# Altium PCB LPCB279R0.PcbDoc (part 3 of 3)
Units mm, origin at the board's own origin, x right, y up, seen from the top; angles counter-clockwise.
Board outline 96 x 109 mm, 2 copper layers (Top Layer, Bottom Layer); 115 components, 90 nets, 384 pads, 812 vias.
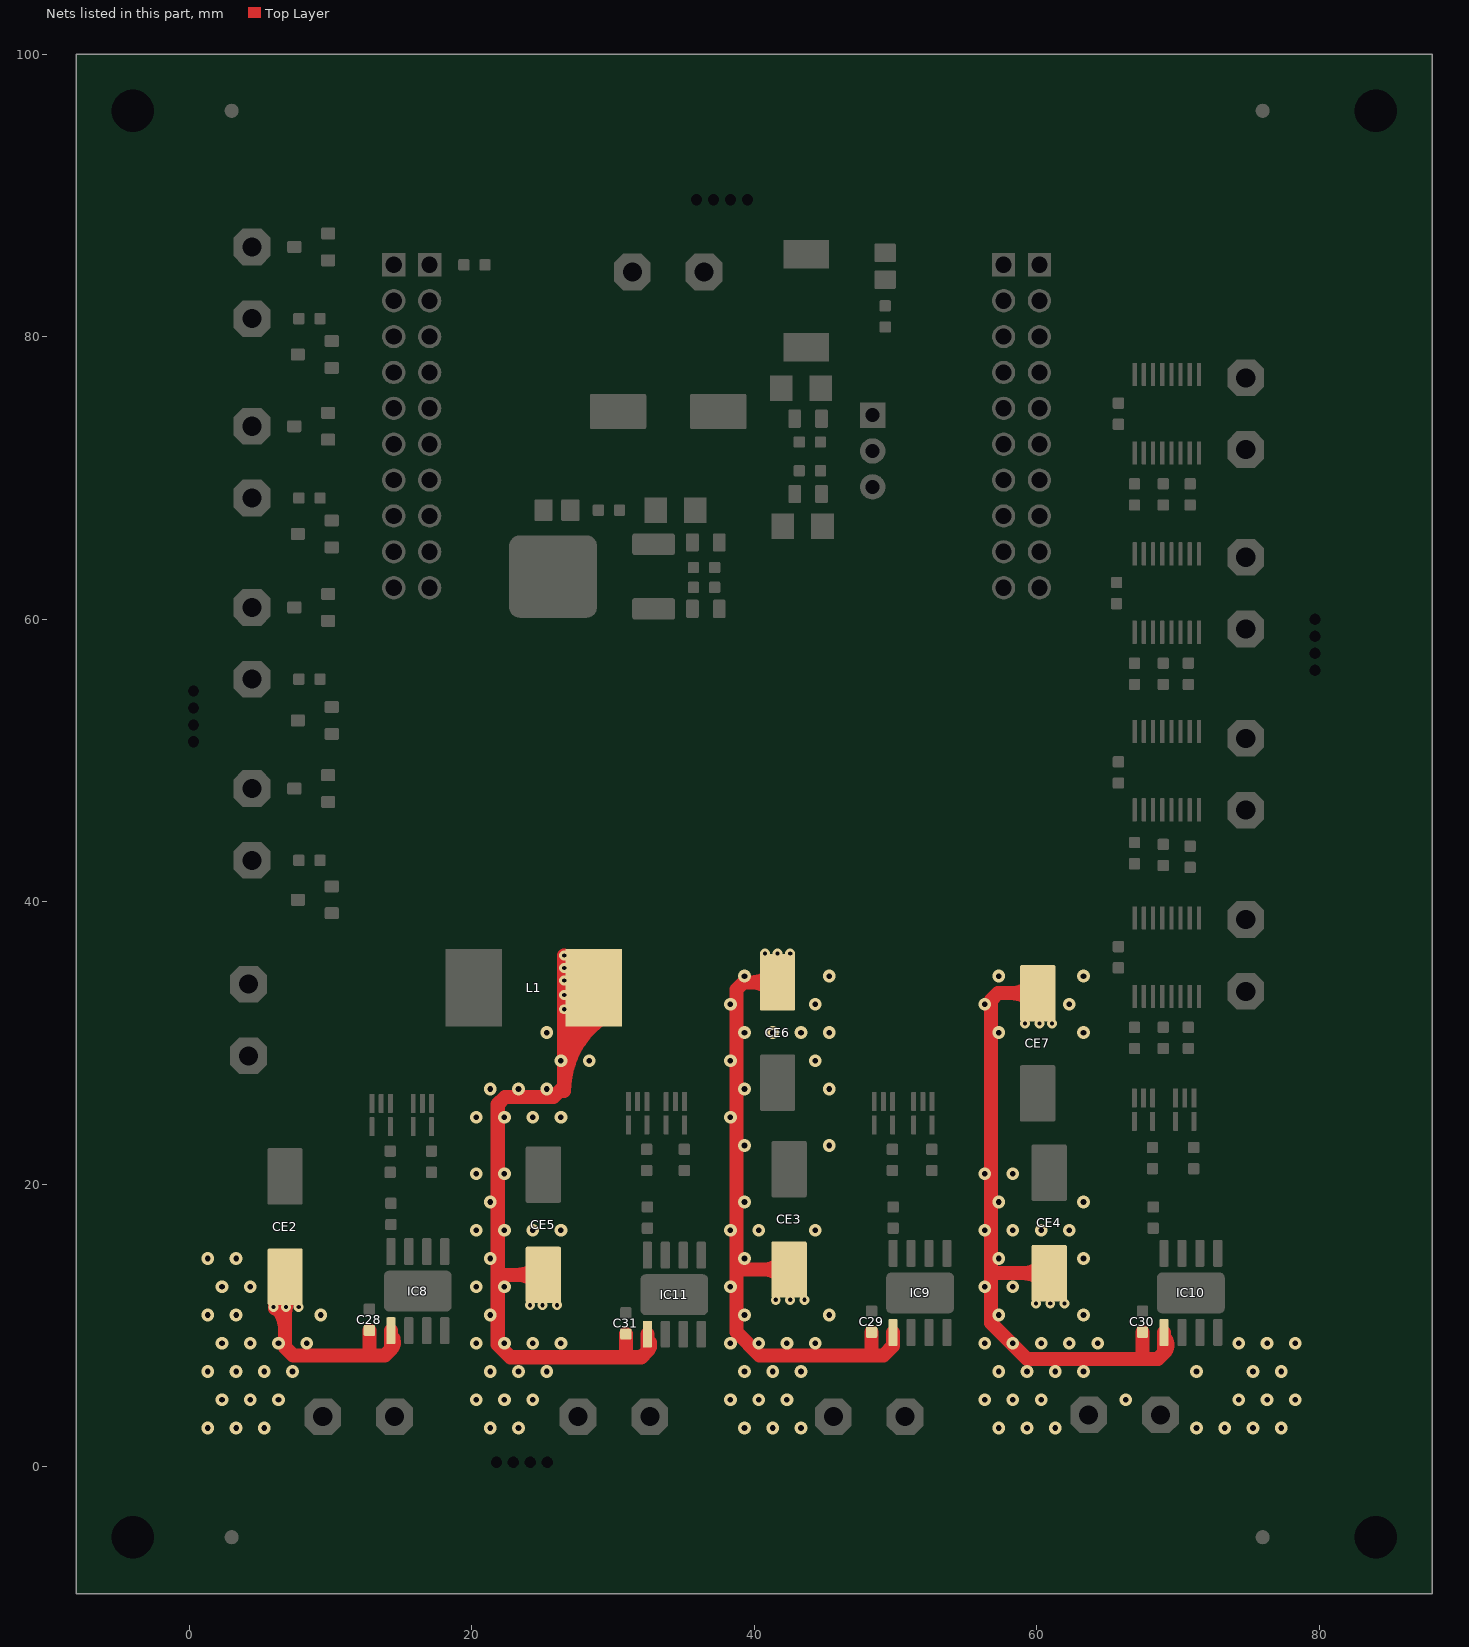
[diagram p3: the nets of this part, all layers, seen from the top]

## Via types
v1: diameter 0.9, hole 0.4, Top Layer to Bottom Layer, tented both sides, 631 vias
v2: diameter 0.7, hole 0.3, Top Layer to Bottom Layer, tented both sides, 111 vias
v3: diameter 0.6, hole 0.2, Top Layer to Bottom Layer, tented both sides, 33 vias
v4: diameter 0.7, hole 0.33, Top Layer to Bottom Layer, tented bottom, 24 vias
v5: diameter 0.8, hole 0.4, Top Layer to Bottom Layer, tented both sides, 13 vias

## Nets (pads, with @x,y where several pads share a name; then routed paths per layer and width w, separated by ;. In a path a pad name is that pad's centre, name@x,y a point inside that pad or via, vN(x,y) a via of type N, cw(c..) or ccw(c..) an arc to the next point about the centre after c; other vN are vias at no path point) (continued)
VMOTOR: C28.1 C29.1 C30.1 C31.1 CE2.1 CE3.1 CE4.1 CE5.1 CE6.1 CE7.1 IC8.5 IC9.5 IC10.5 IC11.5 L1.2 | length 203.4
  Top Layer w1: v2@6.075,11.197 ccw(c4.364,12.908) CE2.1@6.784,12.908 ; v2@6.075,11.409 cw(c4.364,9.698) 6.784,9.698 ; CE2.1@6.254,12.169 cw(c4.973,10.888) 6.784,10.888 cw(c8.595,10.888) CE2.1@7.314,12.169 ; CE2.1@6.784,13.449 6.784,8.456 7.366,7.874 12.827,7.874 ; C28.1@12.753,9.645 12.753,7.948 12.827,7.874 ; 14.085,8.116 ccw(c13.199,9.002) IC8.5@14.452,9.002 ; IC8.5@14.277,9.627 14.277,8.308 ; IC8.5@14.441,9.063 cw(c13.772,8.813) 14.277,8.308 ; CE5.1@24.542,13.046 ccw(c23.261,11.765) 23.261,13.576 ccw(c23.261,15.387) CE5.1@24.542,14.106 ; CE5.1@25.072,13.576 21.857,13.576 21.844,13.589 ; 26.543,26.583 cw(c32.86,26.583) L1.2@29.445,31.897 ; v1@26.543,28.414 cw(c31.683,28.414) L1.2@28.904,32.738 ; 26.543,30.246 cw(c30.506,30.246) L1.2@28.364,33.58 ; v2@26.543,32.077 cw(c29.329,32.077) L1.2@27.823,34.421 ; v2(26.543,36.195) v2(26.543,35.306) v2(26.543,34.417) v2(26.543,33.401) v2(26.543,32.385) 26.543,26.924 25.781,26.162 22.352,26.162 21.844,25.654 21.844,13.589 ; v2@26.553,33.251 ccw(c26.508,33.901) L1.2@26.999,33.474 ; L1.2@26.669,33.482 cw(c26.158,33.155) L1.2@26.751,33.025 ; C31.1@30.914,9.391 30.914,7.821 30.988,7.747 ; 32.336,8.079 ccw(c31.667,8.748) IC11.5@32.613,8.748 ; IC11.5@32.438,9.373 32.438,8.181 ; IC11.5@32.608,8.79 cw(c31.983,8.636) 32.438,8.181 ; CE6.1@41.126,33.754 ccw(c39.845,32.473) 39.845,34.284 ccw(c39.845,36.095) CE6.1@41.126,34.814 ; CE6.1@41.656,34.284 39.237,34.284 38.735,33.782 38.735,13.97 ; CE3.1@41.941,13.427 ccw(c40.66,12.146) 40.66,13.957 ccw(c40.66,15.768) CE3.1@41.941,14.487 ; CE3.1@42.471,13.957 38.748,13.957 38.735,13.97 ; C29.1@48.313,9.518 48.313,7.927 48.26,7.874 ; IC9.5@49.837,9.5 49.837,8.562 49.149,7.874 48.26,7.874 ; CE7.1@59.541,32.992 ccw(c58.26,31.711) 58.26,33.522 ccw(c58.26,35.333) CE7.1@59.541,34.052 ; CE7.1@60.071,33.522 57.271,33.522 56.769,33.02 56.769,13.589 ; CE4.1@60.356,13.173 ccw(c59.075,11.892) 59.075,13.703 ccw(c59.075,15.514) CE4.1@60.356,14.233 ; CE4.1@60.886,13.703 56.883,13.703 56.769,13.589 ; C30.1@67.49,9.518 67.49,7.694 67.564,7.62 ; 68.732,7.772 ccw(c67.629,8.875) IC10.5@69.189,8.875 ; IC10.5@69.014,9.5 69.014,8.054 ; IC10.5@69.173,8.949 cw(c68.453,8.615) 69.014,8.054 ; 12.827,7.874 13.843,7.874 14.277,8.308 ; 21.844,13.589 21.844,8.636 22.733,7.747 30.988,7.747 ; 30.988,7.747 32.004,7.747 32.438,8.181 ; 38.735,13.97 38.735,9.525 40.386,7.874 48.26,7.874 ; 56.769,13.589 56.769,10.16 59.309,7.62 67.564,7.62 ; 67.564,7.62 68.58,7.62 69.014,8.054
  other v1: 1.315,2.732 3.315,2.732 5.315,2.732 21.315,2.732 23.315,2.732 39.315,2.732 41.315,2.732 43.315,2.732 57.315,2.732 59.315,2.732 61.315,2.732 71.315,2.732 73.315,2.732 75.315,2.732 77.315,2.732 2.315,4.732 4.315,4.732 6.315,4.732 20.315,4.732 22.315,4.732 24.315,4.732 38.315,4.732 40.315,4.732 42.315,4.732 56.315,4.732 58.315,4.732 60.315,4.732 66.315,4.732 74.315,4.732 76.315,4.732 78.315,4.732 1.315,6.732 3.315,6.732 5.315,6.732 7.315,6.732 21.315,6.732 23.315,6.732 25.315,6.732 39.315,6.732 41.315,6.732 43.315,6.732 57.315,6.732 59.315,6.732 61.315,6.732 63.315,6.732 71.315,6.732 75.315,6.732 77.315,6.732 2.315,8.732 4.315,8.732 6.315,8.732 8.315,8.732 20.315,8.732 22.315,8.732 24.315,8.732 26.315,8.732 38.315,8.732 40.315,8.732 42.315,8.732 44.315,8.732 56.315,8.732 58.315,8.732 60.315,8.732 62.315,8.732 64.315,8.732 74.315,8.732 76.315,8.732 78.315,8.732 1.315,10.732 3.315,10.732 9.315,10.732 21.315,10.732 39.315,10.732 45.315,10.732 57.315,10.732 63.315,10.732 2.315,12.732 4.315,12.732 20.315,12.732 22.315,12.732 38.315,12.732 56.315,12.732 58.315,12.732 1.315,14.732 3.315,14.732 21.315,14.732 39.315,14.732 57.315,14.732 63.315,14.732 20.315,16.732 22.315,16.732 24.315,16.732 26.315,16.732 38.315,16.732 40.315,16.732 44.315,16.732 56.315,16.732 58.315,16.732 60.315,16.732 62.315,16.732 21.315,18.732 39.315,18.732 57.315,18.732 63.315,18.732 20.315,20.732 22.315,20.732 56.315,20.732 58.315,20.732 39.315,22.732 45.315,22.732 20.315,24.732 22.315,24.732 24.315,24.732 26.315,24.732 38.315,24.732 21.315,26.732 23.315,26.732 25.315,26.732 39.315,26.732 45.315,26.732 26.315,28.732 28.315,28.732 38.315,28.732 44.315,28.732 25.315,30.732 39.315,30.732 41.315,30.732 43.315,30.732 45.315,30.732 57.315,30.732 63.315,30.732 38.315,32.732 44.315,32.732 56.315,32.732 62.315,32.732 39.315,34.732 45.315,34.732 57.315,34.732 63.315,34.732
  other v2: 5.969,11.303 6.858,11.303 7.747,11.303 24.13,11.43 25.019,11.43 26.035,11.43 59.944,11.557 60.96,11.557 61.976,11.557 41.529,11.811 42.545,11.811 43.561,11.811 59.182,31.369 60.198,31.369 61.087,31.369 40.767,36.322 41.656,36.322 42.545,36.322
pads on no net: CN10.J1_1 CN10.J1_2 CN10.J1_6 CN10.J1_7 CN10.J2_3 CN10.J2_5 CN10.J2_6 CN10.J2_7 CN10.J3_3 CN10.J3_4 CN10.J3_9 CN10.J3_10 CN10.J4_4 D1.2 D2.2 D4.2 D5.2 D6.2 D7.2 D8.2 D9.2 FID8_1.0 FID8_1_1.0 FID10_1.0 FID10_1_1.0 IC1.7 IC1.14 IC2.7 IC2.14 IC6.7 IC6.14 IC7.7 IC7.14 SN1.0 SN2.0 SN3.0 SN4.0 TOOLHOLE1_1.TOOL TOOLHOLE1_1_1.TOOL TOOLHOLE5_1.TOOL1 TOOLHOLE5_1_1.TOOL1

## Polygon pours and split planes (outlines as drawn)
VMOTOR on Top Layer "Bottom Layer-No Net" (solid, remove dead copper, pour order 6): 0,0 80,0 80,10.658 80.01,10.668 79.883,10.541 64.77,10.541 64.77,35.052 64.516,35.306 55.499,35.306 55.499,35.179 54.864,34.544 54.991,34.417 54.991,21.209 54.991,2.667 54.483,2.159 54.356,2.286 43.942,2.286 43.942,4.445 43.815,4.572 43.815,6.604 43.815,6.858 46.101,9.144 45.847,9.398 45.847,34.544 45.847,35.306 44.958,36.195 38.481,36.195 37.846,36.195 37.338,35.687 37.211,35.56 37.211,12.319 37.211,3.048 36.195,2.032 35.941,1.778 25.781,1.778 25.527,1.778 24.892,2.413 24.765,2.54 24.765,3.937 24.765,4.445 26.416,6.096 27.686,7.366 27.686,17.018 27.686,27.305 29.21,28.829 30.734,30.353 30.734,36.322 30.734,36.576 29.972,37.338 29.083,37.338 24.892,37.338 24.384,36.83 24.13,36.576 24.13,34.417 24.13,28.702 23.622,28.194 21.336,28.194 20.828,28.194 20.193,27.559 19.812,27.178 19.812,22.352 19.812,3.302 19.304,2.794 18.669,2.159 15.24,2.159 8.509,2.159 7.747,2.921 7.62,3.048 7.62,3.683 7.62,5.334 8.636,6.35 9.906,7.62 9.906,16.129 9.906,16.383 9.271,17.018 8.89,16.637 0,16.637
DGND on Top Layer "Bottom Layer-No Net" (solid, remove dead copper, pour order 8): 0,90 80,90 80,0 0,0
VMOTOR on Bottom Layer "Bottom Layer-No Net" (solid, remove dead copper, pour order 5): 0,0 80,0 80,10.658 80.01,10.668 79.883,10.541 64.77,10.541 64.77,35.052 64.516,35.306 55.499,35.306 55.499,35.179 54.864,34.544 54.991,34.417 54.991,21.209 54.991,2.667 54.483,2.159 54.356,2.286 43.942,2.286 43.942,4.445 43.815,4.572 43.815,6.604 43.815,6.858 46.101,9.144 45.847,9.398 45.847,34.544 45.847,35.306 44.958,36.195 38.481,36.195 37.846,36.195 37.338,35.687 37.211,35.56 37.211,12.319 37.211,3.048 36.195,2.032 35.941,1.778 25.781,1.778 25.527,1.778 24.892,2.413 24.765,2.54 24.765,3.937 24.765,4.445 26.416,6.096 27.686,7.366 27.686,17.018 27.686,27.305 29.21,28.829 30.734,30.353 30.734,36.322 30.734,36.576 29.972,37.338 29.083,37.338 24.892,37.338 24.384,36.83 24.13,36.576 24.13,34.417 24.13,28.702 23.622,28.194 21.336,28.194 20.828,28.194 20.193,27.559 19.812,27.178 19.812,22.352 19.812,3.302 19.304,2.794 18.669,2.159 15.24,2.159 8.509,2.159 7.747,2.921 7.62,3.048 7.62,3.683 7.62,5.334 8.636,6.35 9.906,7.62 9.906,16.129 9.906,16.383 9.271,17.018 8.89,16.637 0,16.637
DGND on Bottom Layer "Bottom Layer-No Net" (solid, remove dead copper, pour order 7): 0,90 80,90 80,0 0,0

## Keep-outs
Keep-Out Layer:
  lines w0.5: 0,0 0,90 80,90 80,0 0,0

## Silkscreen, mask and mechanical layers (free items; w line width, h text height)
Top Overlay:
  text "5V" at 52.959,83.848 h2 r90
  text "3V" at 24.003,69.37 h2
  text "LPCB279R0" at 79.502,1.016 h3 r90
  text "SOL1" at 14.986,-29.21 h2 r90
Top Paste:
  lines w1: -22.647,-15.577 -22.647,197.423 177.353,197.423 177.353,-15.577 -22.647,-15.577
Mechanical 1:
  lines w0.1: -8,-9 88,-9 88,100 -8,100 -8,-9
  lines w0.127: 0,0 80,0 80,90 0,90 0,0
Mechanical 3:
  lines w2.4: -1.2,50.009 -1.2,-1.2 20.644,-1.2 ; -1.2,56.105 -1.2,91.2 34.741,91.2 ; 26.105,-1.2 81.2,-1.2 81.2,55.597 ; 40.837,91.2 81.2,91.2 81.2,61.693
Mechanical 4:
  lines w0.203: 74.158,-44.783 112.099,-44.783 ; 112.059,-55.215 74.167,-55.223 74.167,-23.219 112.059,-23.215 ; 112.099,-55.222 112.099,-23.222
  lines w0.305: 112.751,-52.533 188.696,-52.536 ; 112.751,-48.533 188.696,-48.523 ; 112.751,-44.777 188.696,-44.793 ; 112.756,-44.77 188.701,-44.786 ; 112.756,-41.045 188.701,-41.048 ; 112.756,-37.045 188.701,-37.035 ; 112.756,-33.045 188.701,-33.047 ; 113.059,-29.215 188.559,-29.215 264.559,-29.215 ; 113.059,-28.715 188.559,-28.715 ; 125.349,-55.972 125.349,-23.222 ; 138.099,-55.972 138.099,-23.222 ; 150.849,-55.972 150.849,-23.222 ; 162.849,-55.972 162.849,-23.222 ; 177.215,-56.01 177.215,-23.244 ; 188.701,-48.544 264.698,-48.544 ; 188.726,-41.051 264.749,-41.051 ; 199.904,-56.037 199.904,-48.544 ; 218.724,-56.037 218.724,-48.544 ; 242.617,-56.09 242.617,-48.507 ; 242.701,-48.544 242.701,-41.051
  lines w0.508: -120.29,-16.032 -115.286,-16.032 ; -120.29,28.951 -115.286,28.951 ; -120.29,73.935 -115.286,73.935 ; -120.29,118.943 -115.286,118.943 ; -120.29,163.927 -115.286,163.927 ; -55.291,-61.041 -55.291,-56.037 ; -55.291,203.957 -55.291,208.961 ; -2.993,203.957 -2.993,208.961 ; 9.707,-61.041 9.707,-56.037 ; 55.343,203.969 55.343,208.973 ; 74.706,-61.041 74.706,-56.037 ; 112.809,-55.965 112.809,-23.215 264.559,-23.215 ; 139.704,-61.041 139.704,-56.037 ; 139.704,203.957 139.704,208.961 ; 188.697,-23.259 188.701,-56.037 ; 204.703,-61.041 204.703,-56.037 ; 204.703,203.957 204.703,208.961 ; 264.698,-16.032 269.702,-16.032 ; 264.698,28.951 269.702,28.951 ; 264.723,73.935 269.702,73.935 ; 264.723,118.943 269.702,118.943 ; 264.723,163.927 269.702,163.927 ; -120.29,-61.041 -120.29,208.961 269.702,208.961 269.702,-61.041 -120.29,-61.041 ; -115.286,-56.037 -115.286,203.957 264.723,203.957 264.723,-56.037 -115.286,-56.037
  text "1" at -85.289,204.948 h3
  text "2" at -37.994,204.948 h3
  text "3" at 39.705,204.948 h3
  text "4" at 103.713,204.948 h3
  text "5" at 172.724,204.948 h3
  text "6" at 233.71,204.948 h3
  text "A" at -118.283,182.951 h3
  text "A" at 265.714,182.951 h3
  text "B" at 265.714,139.924 h3
  text "B" at -118.283,138.933 h3
  text "C" at -118.283,93.95 h3
  text "C" at 265.714,93.95 h3
  text "D" at -118.283,48.966 h3
  text "D" at 265.714,48.966 h3
  text ".PCB_FILE_NAME_NO_PATH" at 272.543,32.303 h1.52 r90
  text "FILENAME:" at 272.416,21.635 h1.52 r90
  text "E" at -118.283,3.958 h3
  text "E" at 265.714,3.958 h3
  text "SIL3_PCBTEMPLATE_A3.PCB" at 272.67,-10.75 h1.52 r90
  text "TEMPLATE:" at 272.521,-22.72 h1.52 r90
  text "ISSUE" at 115.559,-26.715 h2.01
  text "DATE" at 128.059,-26.715 h2.01
  text "ECN" at 141.559,-26.715 h2.01
  text "DRAWN" at 152.559,-26.715 h2.01
  text "APP" at 179.559,-26.715 h2.01
  text "SIL3 Pty Ltd" at 75.693,-26.752 h2.54
  text "CHECKED" at 164.134,-26.8 h2.01
  text ".SIL3_PROJECT" at 205.106,-27.26 h1.78
  text "PROJECT:" at 190.305,-27.389 h2.01
  text "Factory 10" at 75.541,-30.308 h1.52
  text "R1.0" at 115.16,-32.124 h2.01
  text "PCB DESCRIPTION:" at 190.559,-32.215 h2.01
  text "01.08.12" at 126.259,-32.342 h2.01
  text "LJG" at 153.768,-32.378 h2.01
  text "9-13 Dingley Avenue" at 75.541,-33.229 h1.52
  text "Dandenong, VICTORIA, 3175" at 75.541,-35.769 h1.52
  text ".SIL3_PCB_DESC" at 190.501,-37.166 h2.5
  text "AUSTRALIA" at 75.541,-38.436 h1.52
  text "F" at -118.283,-41.051 h3
  text "F" at 265.714,-41.051 h3
  text "http://www.sil3.com.au" at 75.541,-41.103 h1.52
  text "LAYER" at 243.46,-43.897 h2.01
  text "ASSY. NUMBER:" at 190.501,-44.532 h2.01
  text ".SIL3_LDLREV" at 214.123,-46.056 h3
  text ".DATE_PRINT" at 272.559,-47.215 h1.52 r90
  text "GENERAL TOLERANCE:" at 81.66,-47.831 h1.52
  text "+" at 87.248,-50.498 h1.27
  text "CLASIFFICATION:" at 242.965,-50.883 h2.01
  text "0.2 mm" at 89.788,-51.006 h1.65
  text "SCALE:" at 189.516,-51.033 h2.01
  text "SHEET" at 206.71,-51.033 h2.01
  text "-" at 87.248,-51.641 h1.27
  text "UNLESS OTHERWISE SPECIFIED" at 77.85,-54.054 h1.52
  text "1 OF 1" at 205.36,-54.438 h2.01
  text "NTS" at 190.627,-54.591 h2.01
  text "UNCLASSIFIED" at 244.235,-54.693 h2.03
  text "A3" at 265.559,-59.715 h1.78
  text "1" at -85.289,-60.05 h3
  text "2" at -25.294,-60.05 h3
  text "3" at 39.705,-60.05 h3
  text "4" at 103.713,-60.05 h3
  text "5" at 172.724,-60.05 h3
  text "6" at 233.71,-60.05 h3
  text "PRINT DATE:" at 272.521,-60.66 h1.52 r90

## Text inside footprints (layer, text, board x,y; h text height)
CN10: Top Overlay "J1" at 13.278,87.09 h2; Top Overlay "J2" at 58.978,87.09 h2; Top Overlay "J3" at 15.818,87.09 h2; Top Overlay "J4" at 56.438,87.09 h2
LBL1: Top Overlay "rloop.org" at 70.219,84.701 h1